# Altium PCB FPV0-3.PcbDoc (part 3 of 6)
Units mm, origin at the board's own origin, x right, y up, seen from the top; angles counter-clockwise.
Board outline 81.28 x 53.34 mm, 4 copper layers (Top Layer, GND Plane 1, 3v3 Plane 2, Bottom Layer); 178 components, 250 nets, 836 pads, 217 vias.
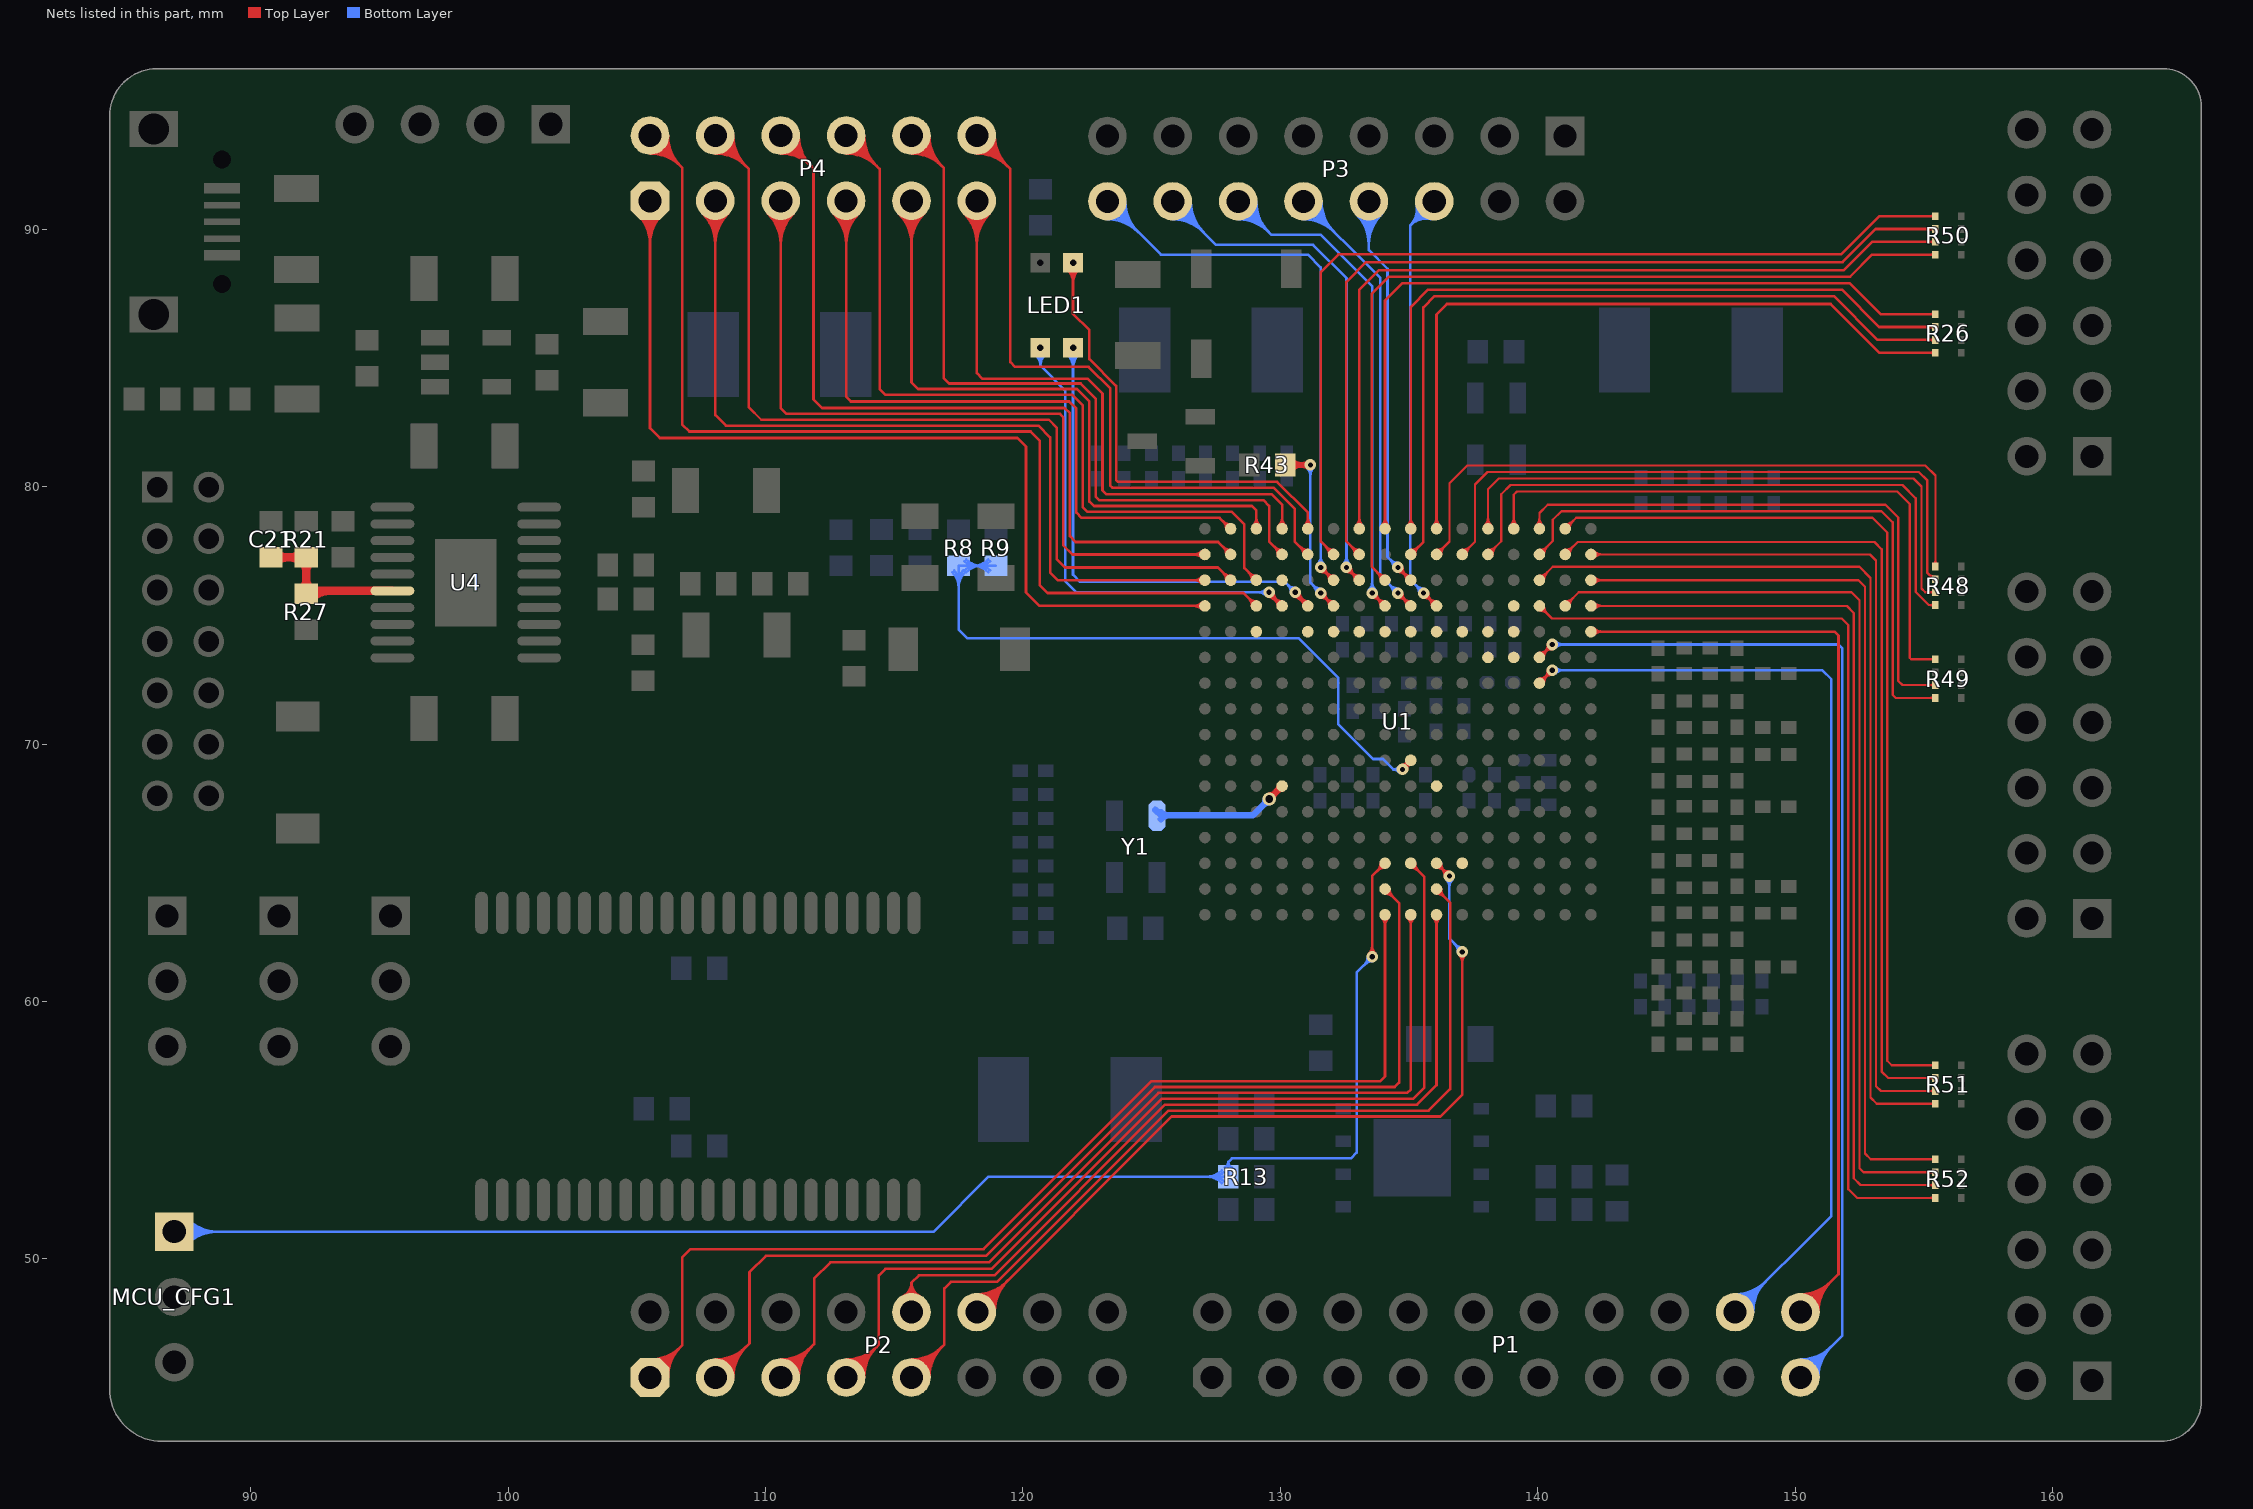
[diagram p5: the nets of this part, all layers, seen from the top]

## Via types
v1: diameter 0.45, hole 0.2, Top Layer to Bottom Layer, tented both sides, 150 vias
v2: diameter 0.55, hole 0.3, Top Layer to Bottom Layer, tented both sides, 55 vias
v3: diameter 0.45, hole 0.2, Top Layer to Bottom Layer, 6 vias
v4: diameter 0.666, hole 0.4, Top Layer to Bottom Layer, tented both sides, 4 vias
v5: diameter 0.513, hole 0.3, Top Layer to Bottom Layer, tented both sides, 1 vias
v6: diameter 0.55, hole 0.23, Top Layer to Bottom Layer, tented both sides, 1 vias

## Nets (pads, with @x,y where several pads share a name; then routed paths per layer and width w, separated by ;. In a path a pad name is that pad's centre, name@x,y a point inside that pad or via, vN(x,y) a via of type N, cw(c..) or ccw(c..) an arc to the next point about the centre after c; other vN are vias at no path point) (continued)
BANK15_IO28: P2.12 U1.G14 | length 44
  Top Layer w0.102: P2.12@118.207,47.926 118.207,47.954 125.781,55.528 136.224,55.528 137.069,56.373 v1(137.069,61.925) ; P2.12@118.207,48.32 ccw(c118.207,49.203) 118.831,48.579 ; P2.12@118.207,48.422 ccw(c118.207,49.55) 119.005,48.752 ; P2.12@118.207,48.523 ccw(c118.207,49.897) 119.178,48.926 ; P2.12@118.207,48.625 ccw(c118.207,50.244) 119.352,49.099 ; P2.12@118.5,47.926 cw(c119.275,47.926) 118.727,48.474 ; P2.12@118.601,47.926 cw(c119.622,47.926) 118.9,48.648 ; P2.12@118.703,47.926 cw(c119.969,47.926) 119.074,48.821 ; P2.12@118.804,47.926 cw(c120.316,47.926) 119.247,48.994 ; P2.12@118.906,47.926 cw(c120.663,47.926) 119.421,49.168 ; U1.G14@136.069,65.192 cw(c136.069,64.772) 136.366,65.069 cw(c136.664,65.366) U1.G14@136.243,65.366 ; U1.G14@136.069,65.366 v1(136.569,64.866) ; v1@136.395,64.866 ccw(c135.974,64.866) 136.272,65.163 ccw(c136.569,65.461) v1@136.569,65.04 ; v1@136.946,61.802 cw(c136.649,61.505) 137.069,61.505 cw(c137.49,61.505) v1@137.192,61.802
  Bottom Layer w0.102: v1@136.446,64.743 cw(c136.148,64.445) 136.569,64.445 cw(c136.99,64.445) v1@136.692,64.743 ; v1(136.569,64.866) 136.569,62.44 v1@137.084,61.925 ; 136.761,62.248 cw(c136.439,61.925) v1@136.895,61.925 ; 136.797,62.212 ccw(c137.069,62.485) v1@137.069,62.099
BANK15_IO29: U1.F14
BANK15_IO30: P2.5 U1.H16 | length 46.3
  Top Layer w0.102: P2.5@110.587,45.386 111.887,46.686 111.887,49.225 112.522,49.86 118.676,49.86 125.258,56.442 134.928,56.442 135.069,56.583 U1.H16@135.069,63.366 ; P2.5@110.587,45.78 ccw(c110.587,46.732) 111.26,46.059 ccw(c111.933,45.386) P2.5@110.981,45.386 ; P2.5@110.587,45.882 ccw(c110.587,47.079) 111.434,46.232 ccw(c112.28,45.386) P2.5@111.083,45.386 ; P2.5@110.587,45.983 ccw(c110.587,47.426) 111.607,46.406 ccw(c112.627,45.386) P2.5@111.184,45.386 ; P2.5@110.587,46.085 ccw(c110.587,47.773) 111.78,46.579 ccw(c112.974,45.386) P2.5@111.286,45.386 ; U1.H16@134.946,63.243 cw(c134.649,62.945) 135.069,62.945 cw(c135.49,62.945) U1.H16@135.192,63.243
BANK15_IO31: P2.10 U1.G16 | length 35.3
  Top Layer w0.102: P2.10@115.349,48.548 ccw(c115.083,49.068) 115.667,49.068 ; P2.10@115.395,48.458 ccw(c115.168,48.902) 115.667,48.902 ccw(c116.166,48.902) P2.10@115.939,48.458 ; P2.10@115.441,48.367 ccw(c115.253,48.736) 115.667,48.736 ccw(c116.081,48.736) P2.10@115.892,48.367 ; P2.10@115.667,47.926 115.667,49.068 ; P2.10@115.985,48.548 cw(c116.25,49.068) 115.667,49.068 ; U1.G16@135.946,63.243 cw(c135.649,62.945) 136.069,62.945 cw(c136.49,62.945) U1.G16@136.192,63.243 ; U1.G16@136.069,63.366 136.069,56.745 135.309,55.985 125.519,55.985 118.886,49.352 115.951,49.352 115.667,49.068
BANK15_IO32: P2.3 U1.J15 | length 49.6
  Top Layer w0.102: P2.3@108.047,45.386 109.372,46.711 109.372,49.479 110.007,50.114 118.571,50.114 125.128,56.671 134.446,56.671 134.62,56.845 134.62,63.815 U1.J15@134.069,64.366 ; P2.3@108.047,45.78 ccw(c108.047,46.732) 108.72,46.059 ccw(c109.393,45.386) P2.3@108.441,45.386 ; P2.3@108.047,45.882 ccw(c108.047,47.079) 108.894,46.232 ccw(c109.74,45.386) P2.3@108.543,45.386 ; P2.3@108.047,45.983 ccw(c108.047,47.426) 109.067,46.406 ccw(c110.087,45.386) P2.3@108.644,45.386 ; P2.3@108.047,46.085 ccw(c108.047,47.773) 109.24,46.579 ccw(c110.434,45.386) P2.3@108.746,45.386 ; U1.J15@134.069,64.192 cw(c134.069,63.771) 134.367,64.069 cw(c134.664,64.366) U1.J15@134.243,64.366
BANK15_IO33: P2.1 U1.J16 | length 50.6
  Top Layer w0.102: P2.1@105.507,45.386 106.756,46.635 106.756,50.038 107.086,50.368 118.466,50.368 124.997,56.9 133.887,56.9 134.069,57.082 U1.J16@134.069,63.366 ; P2.1@105.507,45.78 ccw(c105.507,46.732) 106.18,46.059 ccw(c106.853,45.386) P2.1@105.901,45.386 ; P2.1@105.507,45.882 ccw(c105.507,47.079) 106.354,46.232 ccw(c107.2,45.386) P2.1@106.003,45.386 ; P2.1@105.507,45.983 ccw(c105.507,47.426) 106.527,46.406 ccw(c107.547,45.386) P2.1@106.104,45.386 ; P2.1@105.507,46.085 ccw(c105.507,47.773) 106.7,46.579 ccw(c107.894,45.386) P2.1@106.206,45.386 ; U1.J16@133.946,63.243 cw(c133.649,62.945) 134.069,62.945 cw(c134.49,62.945) U1.J16@134.192,63.243
BANK15_IO34: P2.7 U1.H14 | length 46.6
  Top Layer w0.102: P2.7@113.127,45.386 114.402,46.66 114.402,49.352 114.656,49.606 118.781,49.606 125.389,56.214 135.157,56.214 135.585,56.642 135.585,64.85 U1.H14@135.069,65.366 ; P2.7@113.127,45.78 ccw(c113.127,46.732) 113.8,46.059 ccw(c114.473,45.386) P2.7@113.521,45.386 ; P2.7@113.127,45.882 ccw(c113.127,47.079) 113.974,46.232 ccw(c114.82,45.386) P2.7@113.623,45.386 ; P2.7@113.127,45.983 ccw(c113.127,47.426) 114.147,46.406 ccw(c115.167,45.386) P2.7@113.724,45.386 ; P2.7@113.127,46.085 ccw(c113.127,47.773) 114.32,46.579 ccw(c115.514,45.386) P2.7@113.826,45.386 ; U1.H14@135.069,65.192 cw(c135.069,64.771) 135.367,65.069 cw(c135.664,65.366) U1.H14@135.243,65.366
BANK15_IO35: P2.9 U1.G15 | length 43.8
  Top Layer w0.102: P2.9@115.667,45.386 116.942,46.66 116.942,48.844 117.196,49.098 118.992,49.098 125.65,55.757 135.767,55.757 136.601,56.591 136.601,63.834 U1.G15@136.069,64.366 ; P2.9@115.667,45.78 ccw(c115.667,46.732) 116.34,46.059 ccw(c117.013,45.386) P2.9@116.061,45.386 ; P2.9@115.667,45.882 ccw(c115.667,47.079) 116.514,46.232 ccw(c117.36,45.386) P2.9@116.163,45.386 ; P2.9@115.667,45.983 ccw(c115.667,47.426) 116.687,46.406 ccw(c117.707,45.386) P2.9@116.264,45.386 ; P2.9@115.667,46.085 ccw(c115.667,47.773) 116.86,46.579 ccw(c118.054,45.386) P2.9@116.366,45.386 ; U1.G15@136.069,64.192 cw(c136.069,63.771) 136.367,64.069 cw(c136.664,64.366) U1.G15@136.243,64.366
BANK15_IO36: U1.G11
BANK34_IO1: U1.L5
BANK34_IO2: R43.2 U1.L4 | length 14.1
  Top Layer w0.102: R43.2@130.189,80.848 v1(131.166,80.848) ; R43.2@130.364,80.673 cw(c130.787,80.25) 130.787,80.848 cw(c130.787,81.446) R43.2@130.364,81.023 ; R43.2@130.436,80.601 cw(c131.032,80.005) 131.032,80.848 cw(c131.032,81.691) R43.2@130.436,81.095 ; 130.706,80.769 cw(c130.813,80.327) v1@131.068,80.704 ; 130.706,80.927 ccw(c130.813,81.369) v1@131.068,80.992 ; 130.823,80.798 ccw(c130.749,81.102) v1@131.017,80.939 ; 130.823,80.899 cw(c130.749,80.594) v1@131.017,80.757 ; 130.93,80.823 cw(c130.987,80.585) v1@131.125,80.788 ; 130.93,80.873 ccw(c130.987,81.112) v1@131.125,80.908 ; v1@131.042,80.725 ccw(c130.745,80.428) 130.745,80.848 ccw(c130.745,81.269) v1@131.042,80.971 ; v1@131.569,75.692 cw(c131.569,75.271) 131.866,75.569 cw(c132.164,75.866) v1@131.743,75.866 ; v1(131.569,75.866) U1.L4@132.069,75.366 ; 131.772,75.663 cw(c131.475,75.366) U1.L4@131.895,75.366 ; 131.771,75.664 ccw(c132.069,75.961) U1.L4@132.069,75.54
  Bottom Layer w0.102: v1@131.042,80.725 cw(c130.744,80.426) 131.166,80.426 ; 131.166,80.429 cw(c131.585,80.429) v1@131.289,80.725 ; v1(131.166,80.848) 131.166,76.269 v1(131.569,75.866) ; v1@131.395,75.866 ccw(c130.974,75.866) 131.272,76.163 ccw(c131.569,76.461) v1@131.569,76.04
BANK34_IO3: LED1.4 U1.M4 | length 23.9
  Top Layer w0.102: v1@130.545,75.725 cw(c130.435,75.206) U1.M4@130.894,75.471 ; v1@130.566,75.824 cw(c130.499,75.506) 130.78,75.669 ; v1@130.581,75.721 cw(c130.581,75.3) 130.879,75.598 cw(c131.176,75.895) v1@130.756,75.895 ; v1(130.581,75.895) 131.069,75.407 U1.M4@131.069,75.366 ; v1@130.655,75.737 cw(c130.689,75.664) 130.76,75.705 cw(c130.901,75.786) v1@130.746,75.839 ; 130.743,75.734 cw(c130.375,75.366) U1.M4@130.895,75.366 ; v1@130.75,75.85 ccw(c130.961,75.793) 130.772,75.684 ; 130.842,75.634 ccw(c131.069,75.861) U1.M4@131.069,75.54 ; 130.916,75.561 cw(c130.721,75.366) U1.M4@130.997,75.366
  Bottom Layer w0.102: LED1.4@121.712,85.161 cw(c121.148,84.598) 121.945,84.598 cw(c122.743,84.598) LED1.4@122.179,85.161 ; LED1.4@121.784,85.233 cw(c121.394,84.843) 121.945,84.843 cw(c122.497,84.843) LED1.4@122.107,85.233 ; LED1.4@121.945,85.395 121.945,76.581 122.225,76.302 130.175,76.302 v1(130.581,75.895) ; v1@130.407,75.895 ccw(c129.987,75.895) 130.284,76.193 ccw(c130.581,76.49) v1@130.581,76.069
BANK34_IO4: P4.12 U1.M2 | length 35.9
  Top Layer w0.102: P4.12@118.207,92.946 cw(c118.207,91.258) 119.4,92.452 cw(c120.594,93.646) P4.12@118.906,93.646 ; P4.12@118.207,93.048 cw(c118.207,91.605) 119.227,92.625 cw(c120.247,93.646) P4.12@118.804,93.646 ; P4.12@118.207,93.15 cw(c118.207,91.952) 119.054,92.799 cw(c119.9,93.646) P4.12@118.703,93.646 ; P4.12@118.207,93.251 cw(c118.207,92.299) 118.88,92.972 cw(c119.553,93.646) P4.12@118.601,93.646 ; P4.12@118.207,93.646 119.507,92.345 119.507,84.836 119.685,84.658 122.555,84.658 123.393,83.82 123.393,80.035 123.469,79.959 129.743,79.959 130.556,79.146 130.556,77.879 U1.M2@131.069,77.366 ; U1.M2@130.895,77.366 ccw(c130.474,77.366) 130.772,77.663 ccw(c131.069,77.961) U1.M2@131.069,77.54
BANK34_IO5: LED1.1 U1.M1 | length 20.5
  Top Layer w0.102: LED1.1@121.712,88.463 cw(c121.148,87.9) 121.945,87.9 cw(c122.743,87.9) LED1.1@122.179,88.463 ; LED1.1@121.784,88.535 cw(c121.394,88.145) 121.945,88.145 cw(c122.497,88.145) LED1.1@122.107,88.535 ; LED1.1@121.945,88.697 121.945,86.716 122.58,86.081 122.58,84.963 123.622,83.922 123.622,80.264 123.698,80.188 129.87,80.188 131.069,78.989 U1.M1@131.069,78.366 ; U1.M1@130.946,78.489 ccw(c130.649,78.787) 131.069,78.787 ccw(c131.49,78.787) U1.M1@131.192,78.489
BANK34_IO6: U1.N3
BANK34_IO7: P4.10 U1.N2 | length 37.9
  Top Layer w0.102: P4.10@115.667,92.946 cw(c115.667,91.258) 116.86,92.452 cw(c118.054,93.646) P4.10@116.366,93.646 ; P4.10@115.667,93.048 cw(c115.667,91.605) 116.687,92.625 cw(c117.707,93.646) P4.10@116.264,93.646 ; P4.10@115.667,93.15 cw(c115.667,91.952) 116.514,92.799 cw(c117.36,93.646) P4.10@116.163,93.646 ; P4.10@115.667,93.251 cw(c115.667,92.299) 116.34,92.972 cw(c117.013,93.646) P4.10@116.061,93.646 ; P4.10@115.667,93.646 116.916,92.396 116.916,84.226 117.132,84.01 122.237,84.01 122.834,83.414 122.834,79.604 122.961,79.477 129.337,79.477 129.565,79.248 129.565,77.87 U1.N2@130.069,77.366 ; U1.N2@129.895,77.366 ccw(c129.474,77.366) 129.772,77.663 ccw(c130.069,77.961) U1.N2@130.069,77.54
BANK34_IO8: P4.11 U1.N1 | length 32.8
  Top Layer w0.102: P4.11@117.712,90.611 cw(c116.519,89.418) 118.207,89.418 cw(c119.895,89.418) P4.11@118.701,90.611 ; P4.11@117.784,90.683 cw(c116.764,89.663) 118.207,89.663 cw(c119.65,89.663) P4.11@118.629,90.683 ; P4.11@117.856,90.755 cw(c117.009,89.908) 118.207,89.908 cw(c119.404,89.908) P4.11@118.558,90.755 ; P4.11@117.928,90.827 cw(c117.255,90.153) 118.207,90.153 cw(c119.159,90.153) P4.11@118.486,90.827 ; P4.11@118.207,91.106 118.207,84.409 118.415,84.201 122.504,84.201 123.088,83.617 123.088,79.858 123.241,79.705 129.667,79.705 130.069,79.303 U1.N1@130.069,78.366 ; U1.N1@129.946,78.489 ccw(c129.649,78.787) 130.069,78.787 ccw(c130.49,78.787) U1.N1@130.192,78.489
BANK34_IO9: P4.9 U1.P1 | length 34.5
  Top Layer w0.102: P4.9@115.172,90.611 cw(c113.979,89.418) 115.667,89.418 cw(c117.355,89.418) P4.9@116.161,90.611 ; P4.9@115.244,90.683 cw(c114.224,89.663) 115.667,89.663 cw(c117.11,89.663) P4.9@116.089,90.683 ; P4.9@115.316,90.755 cw(c114.469,89.908) 115.667,89.908 cw(c116.864,89.908) P4.9@116.018,90.755 ; P4.9@115.388,90.827 cw(c114.715,90.153) 115.667,90.153 cw(c116.619,90.153) P4.9@115.946,90.827 ; P4.9@115.667,91.106 115.667,84.053 115.926,83.795 122.098,83.795 122.58,83.312 122.58,79.426 122.758,79.248 128.894,79.248 129.069,79.073 U1.P1@129.069,78.366 ; U1.P1@128.946,78.489 ccw(c128.649,78.787) 129.069,78.787 ccw(c129.49,78.787) U1.P1@129.192,78.489
BANK34_IO10: P4.2 U1.P4 | length 49.2
  Top Layer w0.102: P4.2@105.507,92.946 cw(c105.507,91.258) 106.7,92.452 cw(c107.894,93.646) P4.2@106.206,93.646 ; P4.2@105.507,93.048 cw(c105.507,91.605) 106.527,92.625 cw(c107.547,93.646) P4.2@106.104,93.646 ; P4.2@105.507,93.15 cw(c105.507,91.952) 106.354,92.799 cw(c107.2,93.646) P4.2@106.003,93.646 ; P4.2@105.507,93.251 cw(c105.507,92.299) 106.18,92.972 cw(c106.853,93.646) P4.2@105.901,93.646 ; P4.2@105.507,93.646 106.756,92.396 106.756,82.423 107.036,82.144 120.294,82.144 120.65,81.788 120.65,76.175 120.955,75.87 128.565,75.87 U1.P4@129.069,75.366 ; U1.P4@128.895,75.366 ccw(c128.474,75.366) 128.772,75.663 ccw(c129.069,75.961) U1.P4@129.069,75.54
BANK34_IO11: P4.8 U1.P3 | length 40.4
  Top Layer w0.102: P4.8@113.127,92.946 cw(c113.127,91.258) 114.32,92.452 cw(c115.514,93.646) P4.8@113.826,93.646 ; P4.8@113.127,93.048 cw(c113.127,91.605) 114.147,92.625 cw(c115.167,93.646) P4.8@113.724,93.646 ; P4.8@113.127,93.15 cw(c113.127,91.952) 113.974,92.799 cw(c114.82,93.646) P4.8@113.623,93.646 ; P4.8@113.127,93.251 cw(c113.127,92.299) 113.8,92.972 cw(c114.473,93.646) P4.8@113.521,93.646 ; P4.8@113.127,93.646 114.427,92.345 114.427,83.795 114.656,83.566 121.92,83.566 122.326,83.16 122.326,79.197 122.504,79.019 128.118,79.019 128.6,78.537 128.6,76.835 U1.P3@129.069,76.366 ; U1.P3@128.895,76.366 ccw(c128.474,76.366) 128.772,76.663 ccw(c129.069,76.961) U1.P3@129.069,76.54
BANK34_IO12: U1.M5
BANK34_IO13: LED1.3 U1.N4 | length 23.2
  Top Layer w0.102: v1@129.529,75.725 cw(c129.412,75.175) U1.N4@129.898,75.456 ; v1@129.55,75.824 cw(c129.476,75.476) 129.784,75.654 ; v1@129.565,75.721 cw(c129.565,75.3) 129.863,75.598 cw(c130.16,75.895) v1@129.74,75.895 ; v1(129.565,75.895) 130.069,75.391 U1.N4@130.069,75.366 ; v1@129.621,75.73 cw(c129.662,75.608) 129.774,75.672 ; 129.754,75.707 cw(c129.413,75.366) U1.N4@129.895,75.366 ; 129.815,75.645 ccw(c130.069,75.899) U1.N4@130.069,75.54 ; v1@129.734,75.85 ccw(c129.912,75.802) 129.752,75.71 cw(c129.912,75.802) v1@129.734,75.85
  Bottom Layer w0.102: LED1.3@120.469,85.137 cw(c120.128,84.709) 120.675,84.709 ; LED1.3@120.533,85.216 cw(c120.297,84.92) 120.675,84.92 cw(c121.054,84.92) LED1.3@120.818,85.216 ; LED1.3@120.675,85.395 120.675,84.709 ; LED1.3@120.881,85.137 ccw(c121.222,84.709) 120.675,84.709 ; v1@129.442,75.772 ccw(c129.145,75.475) 129.145,75.895 ccw(c129.145,76.316) v1@129.442,76.018 ; v1(129.565,75.895) 122.072,75.895 121.641,76.327 121.641,83.744 120.675,84.709
BANK34_IO14: P4.6 U1.R2 | length 41.2
  Top Layer w0.102: P4.6@110.587,92.946 cw(c110.587,91.258) 111.78,92.452 cw(c112.974,93.646) P4.6@111.286,93.646 ; P4.6@110.587,93.048 cw(c110.587,91.605) 111.607,92.625 cw(c112.627,93.646) P4.6@111.184,93.646 ; P4.6@110.587,93.15 cw(c110.587,91.952) 111.434,92.799 cw(c112.28,93.646) P4.6@111.083,93.646 ; P4.6@110.587,93.251 cw(c110.587,92.299) 111.26,92.972 cw(c111.933,93.646) P4.6@110.981,93.646 ; P4.6@110.587,93.646 111.862,92.371 111.862,83.388 112.192,83.058 121.615,83.058 121.818,82.855 121.818,78.08 122.047,77.851 127.584,77.851 U1.R2@128.069,77.366 ; U1.R2@127.895,77.366 ccw(c127.474,77.366) 127.772,77.663 ccw(c128.069,77.961) U1.R2@128.069,77.54
BANK34_IO15: P4.7 U1.R1 | length 36
  Top Layer w0.102: P4.7@112.632,90.611 cw(c111.439,89.418) 113.127,89.418 cw(c114.815,89.418) P4.7@113.621,90.611 ; P4.7@112.704,90.683 cw(c111.684,89.663) 113.127,89.663 cw(c114.57,89.663) P4.7@113.549,90.683 ; P4.7@112.776,90.755 cw(c111.929,89.908) 113.127,89.908 cw(c114.324,89.908) P4.7@113.478,90.755 ; P4.7@112.848,90.827 cw(c112.175,90.153) 113.127,90.153 cw(c114.079,90.153) P4.7@113.406,90.827 ; P4.7@113.127,91.106 113.127,83.495 113.309,83.312 121.793,83.312 122.072,83.033 122.072,78.994 122.276,78.791 127.644,78.791 U1.R1@128.069,78.366 ; U1.R1@127.895,78.366 ccw(c127.474,78.366) 127.772,78.663 ccw(c128.069,78.961) U1.R1@128.069,78.54
BANK34_IO16: P4.4 U1.R3 | length 44.6
  Top Layer w0.102: P4.4@108.047,92.946 cw(c108.047,91.258) 109.24,92.452 cw(c110.434,93.646) P4.4@108.746,93.646 ; P4.4@108.047,93.048 cw(c108.047,91.605) 109.067,92.625 cw(c110.087,93.646) P4.4@108.644,93.646 ; P4.4@108.047,93.15 cw(c108.047,91.952) 108.894,92.799 cw(c109.74,93.646) P4.4@108.543,93.646 ; P4.4@108.047,93.251 cw(c108.047,92.299) 108.72,92.972 cw(c109.393,93.646) P4.4@108.441,93.646 ; P4.4@108.047,93.646 109.347,92.345 109.347,83.083 109.83,82.601 121.006,82.601 121.31,82.296 121.31,77.191 121.641,76.86 127.575,76.86 U1.R3@128.069,76.366 ; U1.R3@127.895,76.366 ccw(c127.474,76.366) 127.772,76.663 ccw(c128.069,76.961) U1.R3@128.069,76.54
BANK34_IO17: P4.5 U1.T2 | length 38.8
  Top Layer w0.102: P4.5@110.092,90.611 cw(c108.899,89.418) 110.587,89.418 cw(c112.275,89.418) P4.5@111.081,90.611 ; P4.5@110.164,90.683 cw(c109.144,89.663) 110.587,89.663 cw(c112.03,89.663) P4.5@111.009,90.683 ; P4.5@110.236,90.755 cw(c109.389,89.908) 110.587,89.908 cw(c111.784,89.908) P4.5@110.938,90.755 ; P4.5@110.308,90.827 cw(c109.635,90.153) 110.587,90.153 cw(c111.539,90.153) P4.5@110.866,90.827 ; P4.5@110.587,91.106 110.587,83.063 110.82,82.829 121.437,82.829 121.564,82.702 121.564,77.724 121.922,77.366 U1.T2@127.069,77.366 ; U1.T2@126.946,77.243 ccw(c126.649,76.945) 126.649,77.366 ccw(c126.649,77.787) U1.T2@126.946,77.489
BANK34_IO18: P4.1 U1.T4 | length 45.5
  Top Layer w0.102: P4.1@105.012,90.611 cw(c103.819,89.418) 105.507,89.418 cw(c107.195,89.418) P4.1@106.001,90.611 ; P4.1@105.084,90.683 cw(c104.064,89.663) 105.507,89.663 cw(c106.95,89.663) P4.1@105.929,90.683 ; P4.1@105.156,90.755 cw(c104.309,89.908) 105.507,89.908 cw(c106.704,89.908) P4.1@105.858,90.755 ; P4.1@105.228,90.827 cw(c104.555,90.153) 105.507,90.153 cw(c106.459,90.153) P4.1@105.786,90.827 ; P4.1@105.507,91.106 105.507,82.275 105.893,81.89 119.786,81.89 120.117,81.559 120.117,75.895 120.646,75.366 U1.T4@127.069,75.366 ; U1.T4@126.946,75.243 ccw(c126.649,74.945) 126.649,75.366 ccw(c126.649,75.787) U1.T4@126.946,75.489
BANK34_IO19: P4.3 U1.T3 | length 42
  Top Layer w0.102: P4.3@107.552,90.611 cw(c106.359,89.418) 108.047,89.418 cw(c109.735,89.418) P4.3@108.541,90.611 ; P4.3@107.624,90.683 cw(c106.604,89.663) 108.047,89.663 cw(c109.49,89.663) P4.3@108.469,90.683 ; P4.3@107.696,90.755 cw(c106.849,89.908) 108.047,89.908 cw(c109.244,89.908) P4.3@108.398,90.755 ; P4.3@107.768,90.827 cw(c107.095,90.153) 108.047,90.153 cw(c108.999,90.153) P4.3@108.326,90.827 ; P4.3@108.047,91.106 108.047,82.783 108.458,82.372 120.599,82.372 121.056,81.915 121.056,76.657 121.348,76.366 U1.T3@127.069,76.366 ; U1.T3@126.946,76.243 ccw(c126.649,75.945) 126.649,76.366 ccw(c126.649,76.787) U1.T3@126.946,76.489
BANK34_IO20: U1.P5
BANK35_IO1: U1.E6
BANK35_IO2: P1.20 U1.A5 | length 45.5
  Top Layer w0.102: U1.A5@142.069,74.366 151.542,74.366 151.689,74.219 151.689,49.404 P1.20@150.211,47.926 ; U1.A5@142.192,74.243 cw(c142.49,73.945) 142.49,74.366 cw(c142.49,74.787) U1.A5@142.192,74.489 ; P1.20@150.211,48.32 ccw(c150.211,49.272) 150.884,48.599 ccw(c151.557,47.926) P1.20@150.605,47.926 ; P1.20@150.211,48.422 ccw(c150.211,49.619) 151.058,48.772 ccw(c151.904,47.926) P1.20@150.707,47.926 ; P1.20@150.211,48.523 ccw(c150.211,49.966) 151.231,48.946 ccw(c152.251,47.926) P1.20@150.808,47.926 ; P1.20@150.211,48.625 ccw(c150.211,50.313) 151.404,49.119 ccw(c152.598,47.926) P1.20@150.91,47.926
BANK35_IO3: R52.4 U1.A4 | length 36.6
  Top Layer w0.089: U1.A4@142.069,75.366 152.015,75.366 152.286,75.095 152.286,53.124 152.548,52.861 R52.4@155.456,52.861 ; U1.A4@142.197,75.238 cw(c142.505,74.93) 142.505,75.366 cw(c142.505,75.802) U1.A4@142.197,75.494 ; R52.4@155.399,52.804 ccw(c155.262,52.667) 155.262,52.861 ccw(c155.262,53.056) R52.4@155.399,52.918
BANK35_IO4: R52.6 U1.B4 | length 37.9
  Top Layer w0.089: U1.B4@141.069,75.366 141.598,75.895 152.197,75.895 152.502,75.59 152.502,53.518 152.658,53.361 R52.6@155.456,53.361 ; U1.B4@141.069,75.547 ccw(c141.069,75.982) 141.377,75.674 ccw(c141.686,75.366) U1.B4@141.25,75.366 ; R52.6@155.399,53.304 ccw(c155.262,53.167) 155.262,53.361 ccw(c155.262,53.556) R52.6@155.399,53.418
BANK35_IO5: R52.8 U1.A3 | length 36.6
  Top Layer w0.089: U1.A3@142.069,76.366 152.463,76.366 152.718,76.111 152.718,54.089 152.945,53.861 R52.8@155.456,53.861 ; U1.A3@142.197,76.238 cw(c142.505,75.93) 142.505,76.366 cw(c142.505,76.802) U1.A3@142.197,76.494 ; R52.8@155.399,53.804 ccw(c155.262,53.667) 155.262,53.861 ccw(c155.262,54.056) R52.8@155.399,53.918
BANK35_IO6: P1.18 U1.C7 | length 48.2
  Top Layer w0.102: U1.C7@140.069,72.366 v1(140.569,72.866) ; U1.C7@140.069,72.54 ccw(c140.069,72.961) 140.367,72.663 ccw(c140.664,72.366) U1.C7@140.243,72.366 ; 140.271,72.568 ccw(c139.974,72.866) v1@140.395,72.866 ; 140.272,72.569 cw(c140.569,72.272) v1@140.569,72.692
  Bottom Layer w0.102: v1(140.569,72.866) 151.06,72.866 151.409,72.517 151.409,51.664 P1.18@147.671,47.926 P1.18@147.701,47.956 ; v1@140.692,72.743 cw(c140.99,72.445) 140.99,72.866 cw(c140.99,73.287) v1@140.692,72.989 ; P1.18@147.671,48.32 ccw(c147.671,49.272) 148.344,48.599 ccw(c149.017,47.926) P1.18@148.065,47.926 ; P1.18@147.671,48.422 ccw(c147.671,49.619) 148.518,48.772 ccw(c149.364,47.926) P1.18@148.167,47.926 ; P1.18@147.671,48.523 ccw(c147.671,49.966) 148.691,48.946 ccw(c149.711,47.926) P1.18@148.268,47.926 ; P1.18@147.671,48.625 ccw(c147.671,50.313) 148.864,49.119 ccw(c150.058,47.926) P1.18@148.37,47.926
BANK35_IO7: P1.19 U1.C6 | length 51.3
  Top Layer w0.102: U1.C6@140.069,73.366 v1(140.569,73.866) ; U1.C6@140.069,73.54 ccw(c140.069,73.96) 140.366,73.663 ccw(c140.664,73.366) U1.C6@140.243,73.366 ; v1@140.395,73.866 cw(c139.974,73.866) 140.272,73.569 cw(c140.569,73.271) v1@140.569,73.692
  Bottom Layer w0.102: v1(140.569,73.866) 151.686,73.866 151.841,73.711 151.841,47.016 P1.19@150.211,45.386 ; v1@140.692,73.743 cw(c140.99,73.445) 140.99,73.866 cw(c140.99,74.287) v1@140.692,73.989 ; P1.19@150.211,45.78 ccw(c150.211,46.732) 150.884,46.059 ccw(c151.557,45.386) P1.19@150.605,45.386 ; P1.19@150.211,45.882 ccw(c150.211,47.079) 151.058,46.232 ccw(c151.904,45.386) P1.19@150.707,45.386 ; P1.19@150.211,45.983 ccw(c150.211,47.426) 151.231,46.406 ccw(c152.251,45.386) P1.19@150.808,45.386 ; P1.19@150.211,46.085 ccw(c150.211,47.773) 151.404,46.579 ccw(c152.598,45.386) P1.19@150.91,45.386
BANK35_IO8: U1.D6
BANK35_IO9: U1.D5
BANK35_IO10: R51.2 U1.C3 | length 37.1
  Top Layer w0.089: U1.C3@140.069,76.366 140.589,76.886 152.502,76.886 152.933,76.454 152.933,56.261 153.175,56.019 R51.2@155.456,56.019 ; U1.C3@140.069,76.547 ccw(c140.069,76.982) 140.377,76.674 ccw(c140.686,76.366) U1.C3@140.25,76.366 ; R51.2@155.399,55.962 ccw(c155.262,55.825) 155.262,56.019 ccw(c155.262,56.213) R51.2@155.399,56.076
BANK35_IO11: R49.2 U1.C2 | length 24.5
  Top Layer w0.089: U1.C2@140.069,77.366 140.589,77.886 140.589,78.715 140.923,79.048 153.362,79.048 153.797,78.613 153.797,71.907 153.912,71.792 R49.2@155.456,71.792 ; U1.C2@140.069,77.547 ccw(c140.069,77.982) 140.377,77.674 ccw(c140.686,77.366) U1.C2@140.25,77.366 ; R49.2@155.399,71.735 ccw(c155.262,71.598) 155.262,71.792 ccw(c155.262,71.987) R49.2@155.399,71.849
BANK35_IO12: R51.6 U1.B2 | length 36.1
  Top Layer w0.089: U1.B2@141.069,77.366 141.554,77.851 153.086,77.851 153.365,77.572 153.365,57.277 153.623,57.019 R51.6@155.456,57.019 ; U1.B2@141.069,77.547 ccw(c141.069,77.982) 141.377,77.674 ccw(c141.686,77.366) U1.B2@141.25,77.366 ; R51.6@155.399,56.962 ccw(c155.262,56.825) 155.262,57.019 ccw(c155.262,57.213) R51.6@155.399,57.076
BANK35_IO13: R51.4 U1.A2 | length 35
  Top Layer w0.089: U1.A2@142.069,77.366 152.91,77.366 153.149,77.127 153.149,56.706 153.336,56.519 R51.4@155.456,56.519 ; U1.A2@142.197,77.238 cw(c142.505,76.93) 142.505,77.366 cw(c142.505,77.802) U1.A2@142.197,77.494 ; R51.4@155.399,56.462 ccw(c155.262,56.325) 155.262,56.519 ccw(c155.262,56.713) R51.4@155.399,56.576
BANK35_IO14: R49.4 U1.C1 | length 23.7
  Top Layer w0.089: U1.C1@139.942,78.494 ccw(c139.633,78.802) 140.069,78.802 ccw(c140.505,78.802) U1.C1@140.197,78.494 ; U1.C1@140.069,78.366 140.069,78.982 140.389,79.302 153.514,79.302 154.013,78.803 154.013,72.453 154.174,72.292 R49.4@155.456,72.292 ; R49.4@155.399,72.235 ccw(c155.262,72.098) 155.262,72.292 ccw(c155.262,72.487) R49.4@155.399,72.349
BANK35_IO15: R51.8 U1.B1 | length 36.4
  Top Layer w0.089: U1.B1@141.069,78.366 141.497,78.794 153.006,78.794 153.581,78.219 153.581,57.696 153.758,57.519 R51.8@155.456,57.519 ; U1.B1@141.069,78.547 ccw(c141.069,78.982) 141.377,78.674 ccw(c141.686,78.366) U1.B1@141.25,78.366 ; R51.8@155.399,57.462 ccw(c155.262,57.325) 155.262,57.519 ccw(c155.262,57.713) R51.8@155.399,57.576
BANK35_IO16: R48.2 U1.E2 | length 24.6
  Top Layer w0.089: U1.E2@138.069,77.366 138.582,77.879 138.582,79.705 138.941,80.064 154.175,80.064 154.686,79.553 154.686,75.913 155.2,75.399 R48.2@155.456,75.399 ; U1.E2@138.069,77.547 ccw(c138.069,77.982) 138.377,77.674 ccw(c138.686,77.366) U1.E2@138.25,77.366 ; R48.2@155.399,75.342 ccw(c155.262,75.205) 155.262,75.399 ccw(c155.262,75.594) R48.2@155.399,75.456
BANK35_IO17: R49.8 U1.D1 | length 24.9
  Top Layer w0.089: U1.D1@138.942,78.494 ccw(c138.633,78.802) 139.069,78.802 ccw(c139.505,78.802) U1.D1@139.197,78.494 ; U1.D1@139.069,78.366 139.069,79.684 139.195,79.81 153.971,79.81 154.457,79.324 154.457,73.355 154.52,73.292 R49.8@155.456,73.292 ; R49.8@155.399,73.235 ccw(c155.262,73.098) 155.262,73.292 ccw(c155.262,73.487) R49.8@155.399,73.349
BANK35_IO18: U1.D4
BANK35_IO19: R52.2 U1.C4 | length 38.7
  Top Layer w0.089: U1.C4@140.069,75.185 cw(c140.069,74.75) 140.377,75.058 cw(c140.686,75.366) U1.C4@140.25,75.366 ; U1.C4@140.069,75.366 140.556,74.879 151.816,74.879 152.07,74.625 152.07,52.705 152.413,52.361 R52.2@155.456,52.361 ; R52.2@155.399,52.304 ccw(c155.262,52.167) 155.262,52.361 ccw(c155.262,52.556) R52.2@155.399,52.418
BANK35_IO20: U1.F5
BANK35_IO21: U1.E5
BANK35_IO22: R48.6 U1.F2 | length 26
  Top Layer w0.089: U1.F2@137.069,77.366 137.566,77.863 137.566,80.086 138.052,80.572 154.81,80.572 155.143,80.239 155.143,76.65 155.394,76.399 R48.6@155.456,76.399 ; U1.F2@137.069,77.547 ccw(c137.069,77.982) 137.377,77.674 ccw(c137.686,77.366) U1.F2@137.25,77.366 ; 155.169,76.623 ccw(c155.456,76.91) R48.6@155.456,76.505 ; 155.321,76.472 ccw(c155.456,76.607) R48.6@155.456,76.416
BANK35_IO23: R48.4 U1.E1 | length 24.2
  Top Layer w0.089: U1.E1@137.942,78.494 ccw(c137.633,78.802) 138.069,78.802 ccw(c138.505,78.802) U1.E1@138.197,78.494 ; U1.E1@138.069,78.366 138.069,79.903 138.484,80.318 154.606,80.318 154.915,80.01 154.915,76.044 155.059,75.899 R48.4@155.456,75.899 ; R48.4@155.399,75.842 ccw(c155.262,75.705) 155.262,75.899 ccw(c155.262,76.094) R48.4@155.399,75.956
BANK35_IO24: U1.G5
BANK35_IO25: P3.6 U1.G4 | length 23
  Top Layer w0.102: v1@135.569,75.692 cw(c135.569,75.271) 135.867,75.568 ; v1(135.569,75.866) U1.G4@136.069,75.366 ; v1@135.743,75.866 ccw(c136.163,75.866) 135.866,75.569 ; U1.G4@135.895,75.366 ccw(c135.474,75.366) 135.772,75.663 ccw(c136.069,75.961) U1.G4@136.069,75.54
  Bottom Layer w0.102: P3.6@135.295,90.952 cw(c134.424,90.783) 135.052,90.156 ; v1@135.395,75.866 ccw(c134.974,75.866) 135.272,76.163 ccw(c135.569,76.461) v1@135.569,76.04 ; P3.6@135.395,90.972 cw(c134.651,90.827) 135.187,90.291 cw(c135.723,89.755) P3.6@135.868,90.499 ; P3.6@135.495,90.991 cw(c134.877,90.871) 135.322,90.426 cw(c135.767,89.981) P3.6@135.887,90.599 ; v1(135.569,75.866) 135.052,76.383 135.052,90.156 ; P3.6@135.848,90.399 ccw(c135.679,89.528) 135.052,90.156 ; P3.6@135.982,91.086 135.052,90.156
BANK35_IO26: R48.8 U1.G2 | length 26.8
  Top Layer w0.089: U1.G2@136.069,77.366 136.576,77.873 136.576,80.137 137.265,80.826 155.064,80.826 155.456,80.434 R48.8@155.456,76.899 ; U1.G2@136.069,77.547 ccw(c136.069,77.982) 136.377,77.674 ccw(c136.686,77.366) U1.G2@136.25,77.366 ; R48.8@155.399,76.981 ccw(c155.262,77.119) 155.456,77.119 ccw(c155.65,77.119) R48.8@155.513,76.981
BANK35_IO27: R26.7 U1.G1 | length 29.6
  Top Layer w0.102: U1.G1@135.946,78.489 ccw(c135.649,78.787) 136.069,78.787 ccw(c136.49,78.787) U1.G1@136.192,78.489 ; U1.G1@136.069,78.366 136.069,86.692 136.474,87.097 151.384,87.097 153.277,85.204 R26.7@155.456,85.204 ; R26.7@155.404,85.151 ccw(c155.277,85.024) 155.277,85.204 ccw(c155.277,85.383) R26.7@155.404,85.256
BANK35_IO28: U1.H5
BANK35_IO29: P3.10 U1.H4 | length 27.7
  Top Layer w0.102: v1@134.569,75.692 cw(c134.569,75.271) 134.867,75.568 cw(c135.163,75.866) v1@134.743,75.866 ; v1(134.569,75.866) U1.H4@135.069,75.366 ; U1.H4@134.895,75.366 ccw(c134.474,75.366) 134.772,75.663 ccw(c135.069,75.961) U1.H4@135.069,75.54
  Bottom Layer w0.102: P3.10@130.902,90.386 cw(c130.902,88.698) 132.095,89.892 cw(c133.289,91.086) P3.10@131.601,91.086 ; P3.10@130.902,90.488 cw(c130.902,89.045) 131.922,90.065 cw(c132.942,91.086) P3.10@131.499,91.086 ; P3.10@130.902,90.59 cw(c130.902,89.392) 131.749,90.239 cw(c132.595,91.086) P3.10@131.398,91.086 ; P3.10@130.902,90.691 cw(c130.902,89.739) 131.575,90.412 cw(c132.248,91.086) P3.10@131.296,91.086 ; P3.10@130.902,91.086 133.883,88.104 133.883,76.552 v1(134.569,75.866) ; v1@134.395,75.866 ccw(c133.974,75.866) 134.272,76.163 ccw(c134.569,76.461) v1@134.569,76.04
BANK35_IO30: U1.J5
BANK35_IO31: P3.12 U1.J4 | length 29.5
  Top Layer w0.102: v1@133.569,75.692 cw(c133.569,75.271) 133.866,75.569 cw(c134.164,75.866) v1@133.743,75.866 ; v1(133.569,75.866) U1.J4@134.069,75.366 ; 133.772,75.663 cw(c133.475,75.366) U1.J4@133.895,75.366 ; 133.771,75.664 ccw(c134.069,75.961) U1.J4@134.069,75.54
  Bottom Layer w0.102: P3.12@128.362,90.386 cw(c128.362,88.698) 129.555,89.892 cw(c130.749,91.086) P3.12@129.061,91.086 ; P3.12@128.362,90.488 cw(c128.362,89.045) 129.382,90.065 cw(c130.402,91.086) P3.12@128.959,91.086 ; P3.12@128.362,90.59 cw(c128.362,89.392) 129.209,90.239 cw(c130.055,91.086) P3.12@128.858,91.086 ; P3.12@128.362,90.691 cw(c128.362,89.739) 129.035,90.412 cw(c129.708,91.086) P3.12@128.756,91.086 ; P3.12@128.362,91.086 129.664,89.784 131.577,89.784 133.569,87.792 v1(133.569,75.866) ; v1@133.446,75.989 ccw(c133.148,76.287) 133.569,76.287 ccw(c133.99,76.287) v1@133.692,75.989
BANK35_IO32: R26.5 U1.H2 | length 31.5
  Top Layer w0.102: U1.H2@135.069,77.366 135.56,77.857 135.56,86.97 135.992,87.401 151.511,87.401 153.209,85.704 R26.5@155.456,85.704 ; U1.H2@135.069,77.54 ccw(c135.069,77.961) 135.367,77.663 ccw(c135.664,77.366) U1.H2@135.243,77.366 ; R26.5@155.404,85.651 ccw(c155.277,85.524) 155.277,85.704 ccw(c155.277,85.883) R26.5@155.404,85.756
BANK35_IO33: R26.3 U1.H1 | length 30.8
  Top Layer w0.102: U1.H1@134.946,78.489 ccw(c134.649,78.787) 135.069,78.787 ccw(c135.49,78.787) U1.H1@135.192,78.489 ; U1.H1@135.069,78.366 135.069,86.987 135.738,87.655 151.816,87.655 153.268,86.204 R26.3@155.456,86.204 ; R26.3@155.404,86.151 ccw(c155.277,86.024) 155.277,86.204 ccw(c155.277,86.383) R26.3@155.404,86.256
BANK35_IO34: R50.2 U1.J3 | length 34.8
  Top Layer w0.102: U1.J3@133.895,76.366 ccw(c133.474,76.366) 133.772,76.663 ccw(c134.069,76.961) U1.J3@134.069,76.54 ; U1.J3@134.069,76.366 133.553,76.882 133.553,87.503 134.214,88.163 152.146,88.163 152.996,89.014 R50.2@155.456,89.014 ; R50.2@155.404,88.961 ccw(c155.277,88.834) 155.277,89.014 ccw(c155.277,89.193) R50.2@155.404,89.066
BANK35_IO35: P3.8 U1.H3 | length 25.7
  Top Layer w0.102: v1@134.569,76.692 cw(c134.569,76.271) 134.866,76.569 cw(c135.164,76.866) v1@134.743,76.866 ; v1(134.569,76.866) U1.H3@135.069,76.366 ; 134.771,76.664 ccw(c135.069,76.961) U1.H3@135.069,76.54 ; 134.772,76.663 cw(c134.475,76.366) U1.H3@134.895,76.366
  Bottom Layer w0.102: P3.8@132.947,90.591 cw(c131.754,89.398) 133.442,89.398 cw(c135.13,89.398) P3.8@133.936,90.591 ; P3.8@133.019,90.663 cw(c131.999,89.643) 133.442,89.643 cw(c134.885,89.643) P3.8@133.864,90.663 ; P3.8@133.091,90.735 cw(c132.244,89.888) 133.442,89.888 cw(c134.639,89.888) P3.8@133.793,90.735 ; P3.8@133.163,90.807 cw(c132.49,90.133) 133.442,90.133 cw(c134.394,90.133) P3.8@133.721,90.807 ; P3.8@133.442,91.086 133.442,89.189 134.163,88.468 134.163,77.272 v1(134.569,76.866) ; v1@134.395,76.866 ccw(c133.974,76.866) 134.272,77.163 ccw(c134.569,77.461) v1@134.569,77.04
BANK35_IO36: R50.4 U1.K1 | length 33.4
  Top Layer w0.102: U1.K1@132.946,78.489 ccw(c132.649,78.787) 133.069,78.787 ccw(c133.49,78.787) U1.K1@133.192,78.489 ; U1.K1@133.069,78.366 133.069,87.654 133.833,88.417 151.899,88.417 152.995,89.514 R50.4@155.456,89.514 ; R50.4@155.404,89.461 ccw(c155.277,89.334) 155.277,89.514 ccw(c155.277,89.693) R50.4@155.404,89.566
BANK35_IO37: R26.1 U1.J1 | length 32
  Top Layer w0.102: U1.J1@133.946,78.489 ccw(c133.649,78.787) 134.069,78.787 ccw(c134.49,78.787) U1.J1@134.192,78.489 ; U1.J1@134.069,78.366 134.069,87.232 134.747,87.909 152.121,87.909 153.326,86.704 R26.1@155.456,86.704 ; R26.1@155.404,86.651 ccw(c155.277,86.524) 155.277,86.704 ccw(c155.277,86.883) R26.1@155.404,86.756
BANK35_IO38: P3.16 U1.L3 | length 32
  Top Layer w0.102: v1@131.569,76.692 cw(c131.569,76.271) 131.867,76.568 ; v1(131.569,76.866) U1.L3@132.069,76.366 ; v1@131.743,76.866 ccw(c132.163,76.866) 131.866,76.569 ; U1.L3@131.895,76.366 ccw(c131.474,76.366) 131.772,76.663 ccw(c132.069,76.961) U1.L3@132.069,76.54
  Bottom Layer w0.102: P3.16@123.282,90.386 cw(c123.282,88.698) 124.475,89.892 cw(c125.669,91.086) P3.16@123.981,91.086 ; P3.16@123.282,90.488 cw(c123.282,89.045) 124.302,90.065 cw(c125.322,91.086) P3.16@123.879,91.086 ; P3.16@123.282,90.59 cw(c123.282,89.392) 124.129,90.239 cw(c124.975,91.086) P3.16@123.778,91.086 ; P3.16@123.282,90.691 cw(c123.282,89.739) 123.955,90.412 cw(c124.628,91.086) P3.16@123.676,91.086 ; P3.16@123.282,91.086 125.354,89.014 131.077,89.014 131.569,88.522 v1(131.569,76.866) ; v1@131.446,76.989 ccw(c131.148,77.287) 131.569,77.287 ccw(c131.99,77.287) v1@131.692,76.989
BANK35_IO39: R50.8 U1.L2 | length 36.9
  Top Layer w0.102: U1.L2@131.895,77.366 ccw(c131.474,77.366) 131.772,77.663 ccw(c132.069,77.961) U1.L2@132.069,77.54 ; U1.L2@132.069,77.366 131.572,77.863 131.572,88.341 132.258,89.027 151.79,89.027 153.277,90.514 R50.8@155.456,90.514 ; R50.8@155.404,90.461 ccw(c155.277,90.334) 155.277,90.514 ccw(c155.277,90.693) R50.8@155.404,90.566
BANK35_IO40: P3.14 U1.K3 | length 30.2
  Top Layer w0.102: v1@132.569,76.692 cw(c132.569,76.271) 132.866,76.569 cw(c133.164,76.866) v1@132.743,76.866 ; v1(132.569,76.866) U1.K3@133.069,76.366 ; 132.771,76.664 ccw(c133.069,76.961) U1.K3@133.069,76.54 ; 132.772,76.663 cw(c132.475,76.366) U1.K3@132.895,76.366
  Bottom Layer w0.102: P3.14@125.822,90.386 cw(c125.822,88.698) 127.015,89.892 cw(c128.209,91.086) P3.14@126.521,91.086 ; P3.14@125.822,90.488 cw(c125.822,89.045) 126.842,90.065 cw(c127.862,91.086) P3.14@126.419,91.086 ; P3.14@125.822,90.59 cw(c125.822,89.392) 126.669,90.239 cw(c127.515,91.086) P3.14@126.318,91.086 ; P3.14@125.822,90.691 cw(c125.822,89.739) 126.495,90.412 cw(c127.168,91.086) P3.14@126.216,91.086 ; P3.14@125.822,91.086 127.509,89.399 131.276,89.399 132.569,88.106 v1(132.569,76.866) ; v1@132.446,76.989 ccw(c132.148,77.287) 132.569,77.287 ccw(c132.99,77.287) v1@132.692,76.989
BANK35_IO41: R50.6 U1.K2 | length 35.5
  Top Layer w0.102: U1.K2@132.895,77.366 ccw(c132.474,77.366) 132.772,77.663 ccw(c133.069,77.961) U1.K2@133.069,77.54 ; U1.K2@133.069,77.366 132.563,77.873 132.563,87.96 133.325,88.722 151.845,88.722 153.136,90.014 R50.6@155.456,90.014 ; R50.6@155.404,89.961 ccw(c155.277,89.834) 155.277,90.014 ccw(c155.277,90.193) R50.6@155.404,90.066
BANK35_IO42: U1.K5
DIN: MCU_CFG1.1 R13.2 U1.J14 | length 72.3
  Top Layer w0.102: v1@133.446,61.855 ccw(c133.148,62.152) 133.569,62.152 ccw(c133.99,62.152) v1@133.692,61.855 ; v1(133.569,61.732) 133.569,64.866 U1.J14@134.069,65.366 ; U1.J14@133.895,65.366 cw(c133.474,65.366) 133.772,65.068 cw(c134.069,64.772) U1.J14@134.069,65.192
  Bottom Layer w0.102: MCU_CFG1.1@87.02,51.054 116.535,51.054 118.669,53.188 R13.2@127.976,53.188 127.976,53.758 ; MCU_CFG1.1@87.299,50.775 cw(c87.973,50.102) 87.973,51.054 cw(c87.973,52.006) MCU_CFG1.1@87.299,51.333 ; MCU_CFG1.1@87.371,50.703 cw(c88.218,49.857) 88.218,51.054 cw(c88.218,52.251) MCU_CFG1.1@87.371,51.405 ; MCU_CFG1.1@87.443,50.631 cw(c88.463,49.611) 88.463,51.054 cw(c88.463,52.497) MCU_CFG1.1@87.443,51.477 ; MCU_CFG1.1@87.515,50.56 cw(c88.708,49.366) 88.708,51.054 cw(c88.708,52.742) MCU_CFG1.1@87.515,51.548 ; R13.2@127.729,52.941 ccw(c127.133,52.345) 127.133,53.188 ccw(c127.133,54.031) R13.2@127.729,53.435 ; R13.2@127.801,53.013 ccw(c127.379,52.59) 127.379,53.188 ccw(c127.379,53.785) R13.2@127.801,53.363 ; R13.2@127.844,53.561 ccw(c127.764,53.758) 127.976,53.758 ; R13.2@128.109,53.561 cw(c128.189,53.758) 127.976,53.758 ; 133.258,61.401 ccw(c132.928,61.732) v1@133.395,61.732 ; 133.304,61.448 cw(c133.569,61.183) v1@133.569,61.557 ; v1@133.579,61.722 132.969,61.112 132.969,54.127 132.74,53.899 128.118,53.899 127.976,53.758
DONE: R8.1 R9.2 U1.H10 | length 34.4
  Top Layer w0.102: v1(134.747,69.012) v1@134.747,69.063 ; v1@134.747,69.044 U1.H10@135.069,69.366 ; v1@134.747,69.186 ccw(c134.747,69.529) U1.H10@134.99,69.287 ; v1@134.755,69.186 ccw(c134.761,69.322) 134.879,69.254 ccw(c134.987,69.191) v1@134.887,69.116 ; v1@134.809,69.175 ccw(c134.88,69.36) 134.979,69.188 ccw(c135.043,69.076) v1@134.917,69.049 ; v1@134.82,69.012 cw(c135.072,69.012) 134.894,69.19 ; U1.H10@134.895,69.366 cw(c134.474,69.366) 134.772,69.069 cw(c135.069,68.771) U1.H10@135.069,69.192 ; v1@134.921,69.012 cw(c135.419,69.012) U1.H10@135.067,69.364
  Bottom Layer w0.102: R8.1@117.253,76.675 cw(c116.657,76.079) 117.5,76.079 cw(c118.343,76.079) R8.1@117.747,76.675 ; R8.1@117.325,76.747 cw(c116.903,76.325) 117.5,76.325 cw(c118.098,76.325) R8.1@117.675,76.747 ; R8.1@117.725,76.747 cw(c118.148,76.325) 118.148,76.922 cw(c118.148,77.52) R8.1@117.725,77.097 ; R8.1@117.797,76.675 cw(c118.393,76.079) 118.393,76.922 cw(c118.393,77.765) R8.1@117.797,77.169 ; R9.2@118.651,76.675 ccw(c118.055,76.079) 118.055,76.922 ccw(c118.055,77.765) R9.2@118.651,77.169 ; R9.2@118.723,76.747 ccw(c118.3,76.325) 118.3,76.922 ccw(c118.3,77.52) R9.2@118.723,77.097 ; R9.2@118.948,76.922 R8.1@117.5,76.922 117.5,74.447 117.831,74.117 130.708,74.117 132.258,72.568 132.258,70.764 133.604,69.418 133.985,69.418 134.391,69.012 ; v1@134.609,68.905 ccw(c134.391,68.736) 134.391,69.012 ; v1@134.609,69.119 cw(c134.391,69.288) 134.391,69.012 ; v1(134.747,69.012) 134.391,69.012
EN: C21.2 R21.2 R27.1 U4.6 | length 10.3
  Top Layer w0.33: C21.2@90.78,77.253 R21.2@92.151,77.253 R27.1@92.151,75.833 ; C21.2@90.996,77.087 cw(c91.397,76.686) 91.397,77.253 cw(c91.397,77.82) C21.2@90.996,77.419 ; R21.2@91.935,77.087 ccw(c91.534,76.686) 91.534,77.253 ccw(c91.534,77.82) R21.2@91.935,77.419 ; R27.1@91.985,75.999 ccw(c91.584,76.4) 92.151,76.4 ccw(c92.718,76.4) R27.1@92.317,75.999 ; R21.2@91.985,77.087 cw(c91.584,76.686) 92.151,76.686 cw(c92.718,76.686) R21.2@92.317,77.087 ; R27.1@92.269,75.951 U4.6@95.499,75.951 ; R27.1@92.367,75.667 cw(c93.053,74.981) 93.053,75.951
GCLK: U1.N11 Y1.3 | length 7.6
  Top Layer w0.254: v5(129.569,67.866) U1.N11@130.069,68.366 ; v5@129.569,67.995 ccw(c129.569,68.308) 129.79,68.087 ccw(c130.011,67.866) v5@129.699,67.866 ; U1.N11@129.971,68.366 cw(c129.735,68.366) 129.902,68.199 cw(c130.069,68.031) U1.N11@130.069,68.268
  Bottom Layer w0.254: Y1.3@125.146,67.437 125.349,67.234 128.937,67.234 v5(129.569,67.866) ; Y1.3@125.349,67.075 cw(c125.734,66.69) 125.734,67.234 ; Y1.3@125.349,67.355 ccw(c125.642,67.647) 125.642,67.234 ; v5@129.44,67.866 cw(c129.127,67.866) 129.348,67.645 cw(c129.569,67.424) v5@129.569,67.736